# EAGLE board TAGPCBv3 (EAGLE 7.4.0)
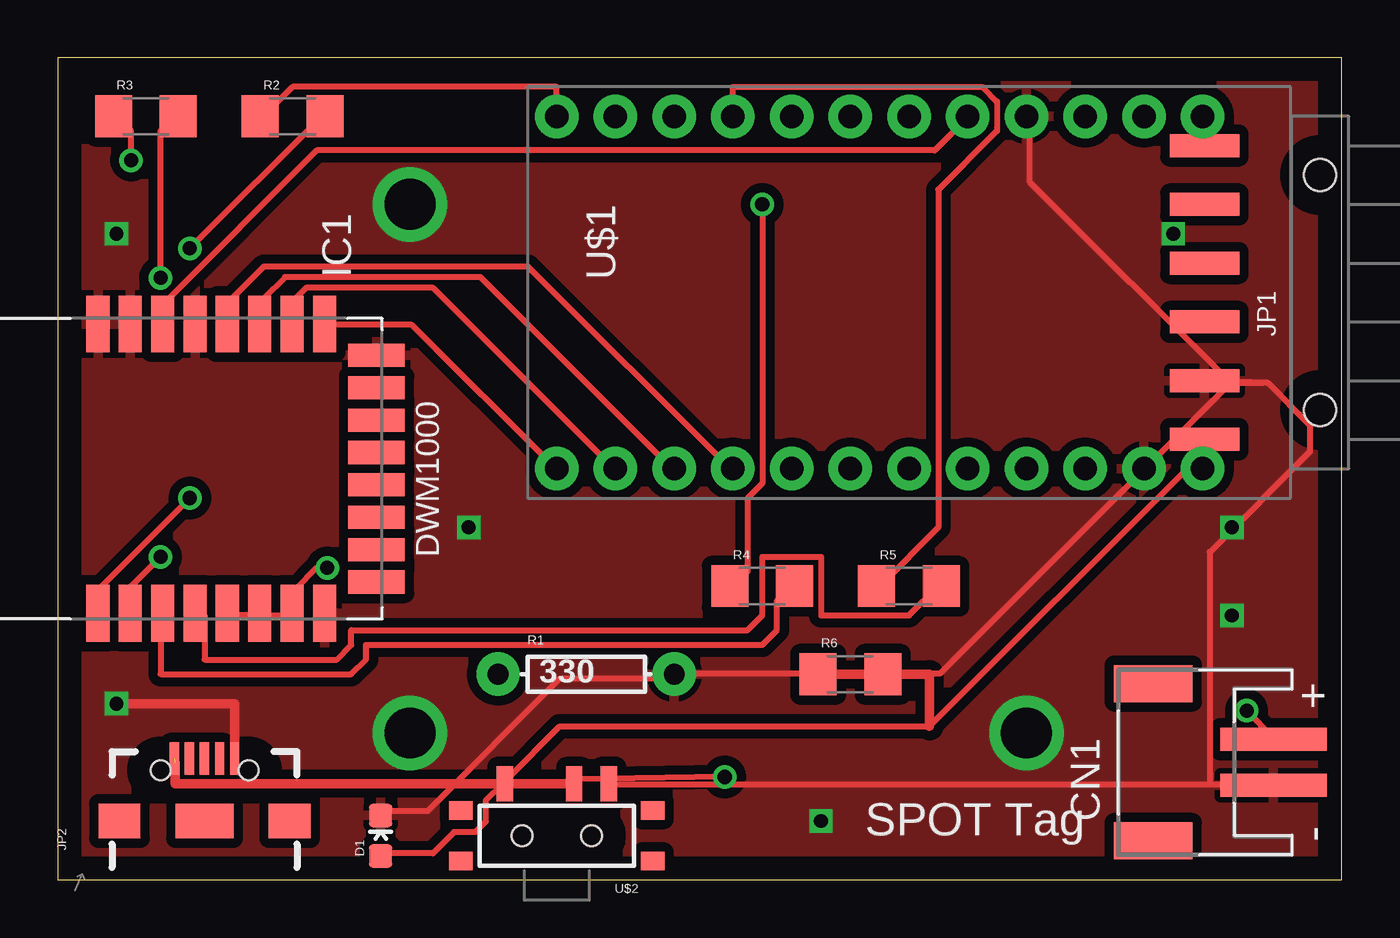
[diagram p0: board, top side]
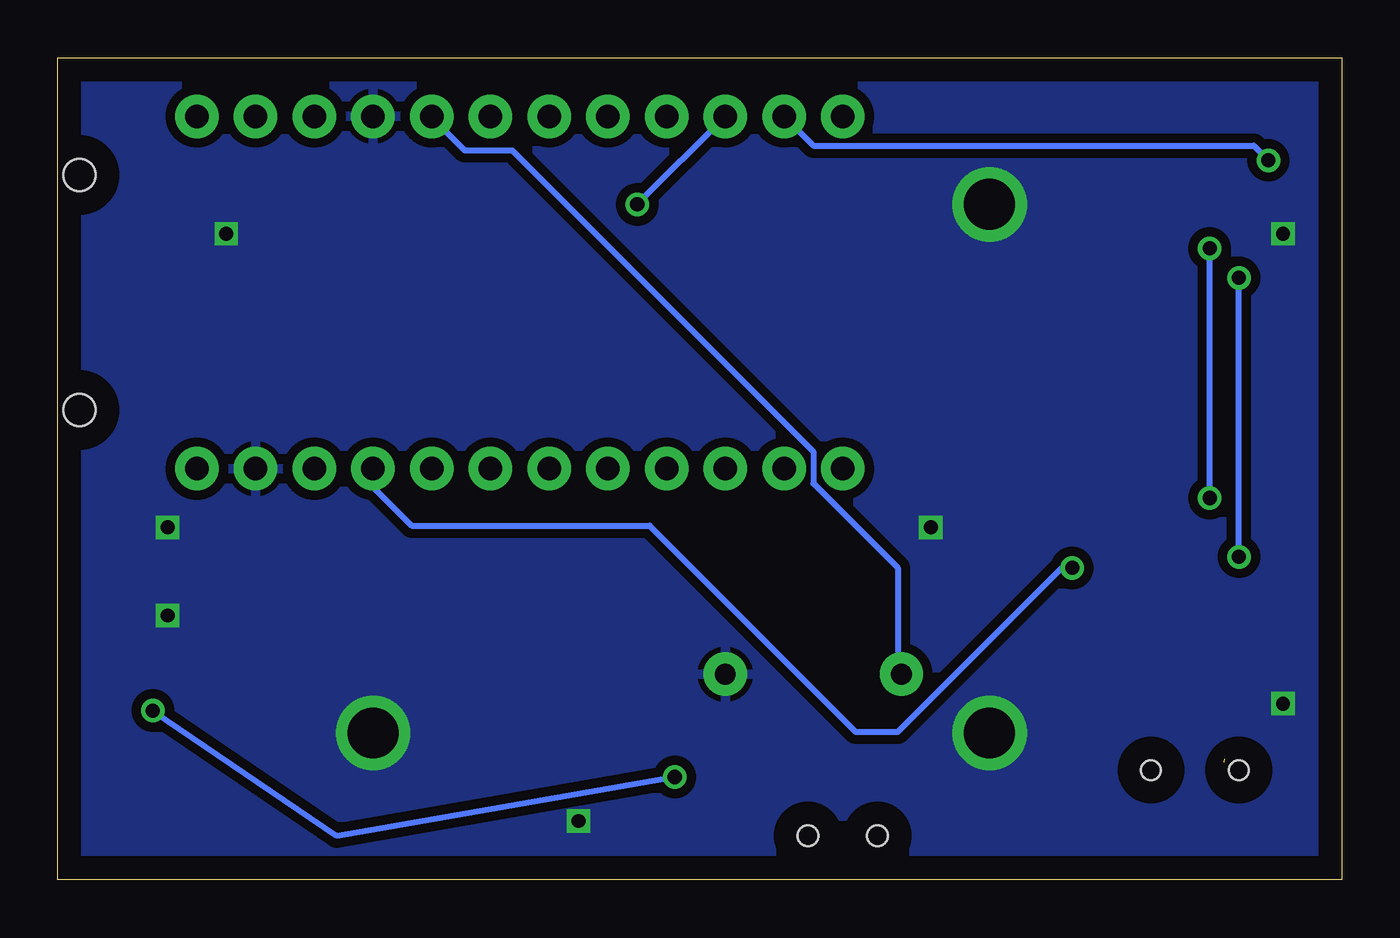
[diagram p1: board, bottom side, seen from below]

Size 55.55 x 35.55 mm. Coordinates in mm from the lower left corner, seen from the top.
Outline: 0,0 55.55,0 55.55,35.55 0,35.55 0,0
Copper layers (1*16): Top 0.035mm / dielectric 1.5mm / Bottom 0.035mm
Design rules "default *": minimum track width 10mil, minimum drill 24mil, track to track 8mil, track to pad 8mil, pad to pad 8mil, via to via 8mil, smd to smd 8mil, copper to edge 40mil, drill to drill 8mil, minimum pad ring 10mil, minimum via ring 8mil, stop-mask expansion 4mil, vias tented up to drill 0mil, thermal gap 10mil

## Footprints (pad centres in the part's own frame; a part is rotated, then mirrored left to right if it is on the bottom)
JST-PH-2-SMT-RA = smd 1 x 4.6: 1 1,-3.7; 2 -1,-3.7 | smd 1.6 x 3.4: NC1 -3.4,1.5; NC2 3.4,1.5
LED-0603 = smd 1 x 1: A 0,-0.877; C 0,0.877
DWM1000 = smd 2.45 x 1: 1 -6.25,0.8; 2 -6.25,-0.6; 3 -6.25,-2; 4 -6.25,-3.4; 5 -6.25,-4.8; 6 -6.25,-6.2; 7 -6.25,-7.6; 8 -6.25,-9; 17 6.25,-9; 18 6.25,-7.6; 19 6.25,-6.2; 20 6.25,-4.8; 21 6.25,-3.4; 22 6.25,-2; 23 6.25,-0.6; 24 6.25,0.8 | smd 1 x 2.45: 9 -4.9,-11.25; 10 -3.5,-11.25; 11 -2.1,-11.25; 12 -0.7,-11.25; 13 0.7,-11.25; 14 2.1,-11.25; 15 3.5,-11.25; 16 4.9,-11.25
1X06-SMD = smd 1 x 3: 1 -6.35,5; 2 -3.81,5; 3 -1.27,5; 4 1.27,5; 5 3.81,5; 6 6.35,5 | hole 1.4: -5.08,0; 5.08,0
USB-AB-MICRO-SMD_V03 = smd 1.4 x 0.4: D+1 2.7,0; D-1 2.7,0.65; GND1 2.7,-1.3; ID1 2.7,-0.65; VBUS1 2.7,1.3 | smd 1.5 x 1.8: SHIELD1 0,3.68; SHIELD3 0,-3.68 | smd 1.5 x 2.5: SHIELD2 0,0 | hole 0.85: 2.2,1.9; 2.2,-1.9
AXIAL-0.3 = drill 0.9 pad 1.88: P$1 -3.81,0; P$2 3.81,0
1206 = smd 1.6 x 1.8: 1 -1.4,0; 2 1.4,0
ARDUINO_MINI = drill 1.016 pad 1.88: 1 -7.62,12.7; 2 -7.62,10.16; 3 -7.62,7.62; 4 -7.62,5.08; 5 -7.62,2.54; 6 -7.62,0; 7 -7.62,-2.54; 8 -7.62,-5.08; 9 -7.62,-7.62; 10 -7.62,-10.16; 11 -7.62,-12.7; 12 -7.62,-15.24; 13 7.62,-15.24; 14 7.62,-12.7; 15 7.62,-10.16; 16 7.62,-7.62; 17 7.62,-5.08; 18 7.62,-2.54; 19 7.62,0; 20 7.62,2.54; 21 7.62,5.08; 22 7.62,7.62; 23 7.62,10.16; 24 7.62,12.7
KPS-1290 = smd 0.7 x 1.5: O -2.25,2.25; P 0.75,2.25; S 2.25,2.25 | smd 1 x 0.8: P$1 -4.15,1.1; P$2 -4.15,-1.1; P$3 4.15,-1.1; P$4 4.15,1.1 | hole 0.9: -1.5,0; 1.5,0

## Placement (x,y rotation side)
CN1  [JST-PH-2-SMT-RA]  48.9,5.08 90 top
D1  GREEN  [LED-0603]  13.97,1.91 0 top
IC1  DWM1000  [DWM1000]  2.54,17.78 90 top
JP1  RA 6Pin SMD  [1X06-SMD]  54.61,25.4 90 top
JP2  [USB-AB-MICRO-SMD_V03]  6.35,2.54 90 top
R1  330  [AXIAL-0.3]  22.86,8.89 0 top
R2  0R  [1206]  10.16,33.02 0 top
R3  0R  [1206]  3.81,33.02 0 top
R4  100K  [1206]  30.48,12.7 0 top
R5  0R  [1206]  36.83,12.7 0 top
R6  1K  [1206]  34.29,8.89 0 top
U$1  ARDUINO_MINI  [ARDUINO_MINI]  36.83,25.4 270 top
U$2  SWITCH_SPDT  [KPS-1290]  21.59,1.91 0 top

## Library data of the parts
CN1 = adafruit
D1 = SparkFun-LED; PROD_ID: DIO-00821
IC1 = decawave
JP1 = SparkFun-Connectors; PROD_ID: CONN-08971
JP2 = SparkFun-Connectors; PROD_ID: CONN-11794
R1-R6 = SparkFun-Resistors
U$1 = SparkFun-Boards
U$2 = SparkFun-Electromechanical; PROD_ID: SWCH-10651

## Nets
BLK: JP1.1
GND: CN1.2 D1.C IC1.8 IC1.16 IC1.21 IC1.23 IC1.24 JP1.2 JP2.GND1 R1.P$2 U$1.4 U$1.23
GRN: JP1.6
N$1: IC1.17 U$1.13
N$2: IC1.22 R1.P$1 U$1.5
N$3: IC1.18 U$1.14
N$4: IC1.19 U$1.15
N$5: IC1.20 U$1.16
N$6: D1.A R6.1 R6.2 U$1.24 U$2.O
N$7: CN1.1 JP2.VBUS1 U$2.P
N$8: IC1.5 IC1.6 IC1.7 U$1.21
N$9: R2.1 U$1.12
N$10: IC1.1 R2.2
N$11: R3.1 U$1.11
N$12: IC1.2 R3.2
N$13: IC1.3 R4.2
N$14: R4.1 U$1.10
N$15: R5.1 U$1.9
N$16: IC1.4 R5.2
N$17: U$2.S
RX1: JP1.4
TX0: JP1.5
VCC: JP1.3

## Tracks (layer width: path | path; a pad name or v marks a point on that pad's centre or on a via)
GND  (via drill 0.6, 2.2, 2.2 pad 3.17)
  Top 0.254: 49.84,4.12 52.58,4.12 CN1.2 | 49.84,4.12 24,4.12 | D1.C 14.17,2.97 16,2.97 21.72,8.69 26.52,8.69 R1.P$2 26.75,8.91 38.18,8.91 46.86,17.6 U$1.23 47.09,17.83 50.75,21.49 | 50.75,21.49 52.12,21.49 JP1.2 | 50.75,21.49 42.06,30.18 42.06,32.92 U$1.4 | 50.75,21.49 JP1.2 | 49.84,4.12 49.84,14.17 54.18,18.52 54.18,19.66 52.35,21.49 JP1.2
  Top 0.406: v2.54,7.62 7.65,7.62 JP2.GND1
  other vias: 2.54,27.94 17.78,15.24 15.24,29.21 33.02,2.54 41.91,6.35 48.26,27.94 15.24,6.35 50.8,11.43 50.8,15.24
  pour Bottom (isolate 0.406): 0,0 0,35.56 55.88,35.56 55.88,0
  pour Top (isolate 0.406): 0,0 0,35.56 55.88,35.56 55.88,34.29 55.88,0
N$1
  Top 0.254: IC1.17 11.66,24 15.32,24 21.49,17.83 U$1.13
N$2
  Top 0.254: IC1.22 4.57,24.23 4.57,24.92 11.2,31.55 37.95,31.55 39.32,32.92 U$1.5
  Bottom 0.254: R1.P$1 19.2,8.91 19.2,13.49 22.86,17.14 22.86,18.52 35.89,31.55 37.95,31.55 39.32,32.92 U$1.5
N$3
  Top 0.254: IC1.18 10.29,24.23 10.29,25.15 10.74,25.6 16.23,25.6 24,17.83 U$1.14
N$4
  Top 0.254: IC1.19 8.91,24.23 8.91,25.15 9.83,26.06 18.29,26.06 26.52,17.83 U$1.15
N$5
  Top 0.254: IC1.20 7.54,24.23 7.54,25.15 8.91,26.52 20.34,26.52 29.03,17.83 U$1.16
N$6
  Top 0.254: D1.A 14.17,1.14 16.23,1.14 17.14,2.06 18.06,2.06 18.52,2.52 18.52,3.43 19.2,4.12 U$2.O 19.43,4.34 21.72,6.63 37.72,6.63 48.69,17.6 49.38,17.6 U$1.24
  Top 0.406: R6.1 R6.2 37.72,8.89 37.72,6.63
N$7  (via drill 0.61)  (1 unrouted)
  Top 0.254: v28.85,4.45 22.4,4.34 U$2.P | v51.44,7.32 52.58,6.17 CN1.1
  Top 0.406: U$2.P 5.08,4.16 5.08,5.08
  Bottom 0.254: v28.85,4.45 43.48,1.91 v51.44,7.32
N$8  (via drill 0.61)
  Top 0.254: IC1.5 7.54,11.43 8.69,11.43 IC1.6 8.91,11.43 10.06,11.43 IC1.7 10.29,11.66 10.29,12.57 11.2,13.49 v11.66,13.49
  Bottom 0.254: v11.66,13.49 12.12,13.49 19.2,6.4 21.03,6.4 29.95,15.32 40.23,15.32 41.83,16.92 41.83,17.6 U$1.21
N$9
  Top 0.254: U$1.12 21.59,34.29 10.16,34.29 8.89,33.02 R2.1
N$10  (via drill 0.61)
  Top 0.254: v5.71,27.3 11.43,33.02 R2.2 | v5.71,16.51 1.91,12.7 1.91,12.06 IC1.1
  Bottom 0.254: v5.71,16.51 v5.71,27.3
N$11  (via drill 0.61)
  Top 0.254: v3.17,31.11 3.17,32.38 2.54,33.02 R3.1
  Bottom 0.254: v3.17,31.11 3.81,31.75 22.86,31.75 U$1.11
N$12  (via drill 0.61)
  Top 0.254: v4.45,26.04 4.45,32.38 5.08,33.02 R3.2 | v4.45,13.97 3.17,12.7 3.17,12.06 IC1.2
  Bottom 0.254: v4.45,13.97 v4.45,26.04
N$13
  Top 0.254: R4.2 31.75,12.7 31.11,12.06 31.11,10.79 30.48,10.16 13.34,10.16 13.34,9.53 12.7,8.89 4.45,8.89 4.45,11.43 IC1.3
N$14  (via drill 0.61)
  Top 0.254: v30.48,29.21 30.48,17.14 29.84,16.51 29.84,13.34 29.21,12.7 R4.1
  Bottom 0.254: U$1.10 v30.48,29.21
N$15
  Top 0.254: U$1.9 29.21,34.29 40.01,34.29 40.64,33.66 40.64,32.38 38.1,29.84 38.1,15.24 35.56,12.7 R5.1
N$16
  Top 0.254: R5.2 38.1,12.7 36.83,11.43 33.02,11.43 33.02,13.97 30.48,13.97 30.48,11.43 29.84,10.79 12.7,10.79 12.7,10.16 12.06,9.53 6.35,9.53 6.35,11.43 IC1.4

## Text on the board
tSilk: DWM1000 | SPOT Tag